# Altium PCB PCB1.PcbDoc
Units mil, origin at the board's own origin, x right, y up, seen from the top; angles counter-clockwise.
Board outline 6000 x 4000 mil, 2 copper layers (Top Layer, Bottom Layer); 56 components, 29 nets, 196 pads, 0 vias.
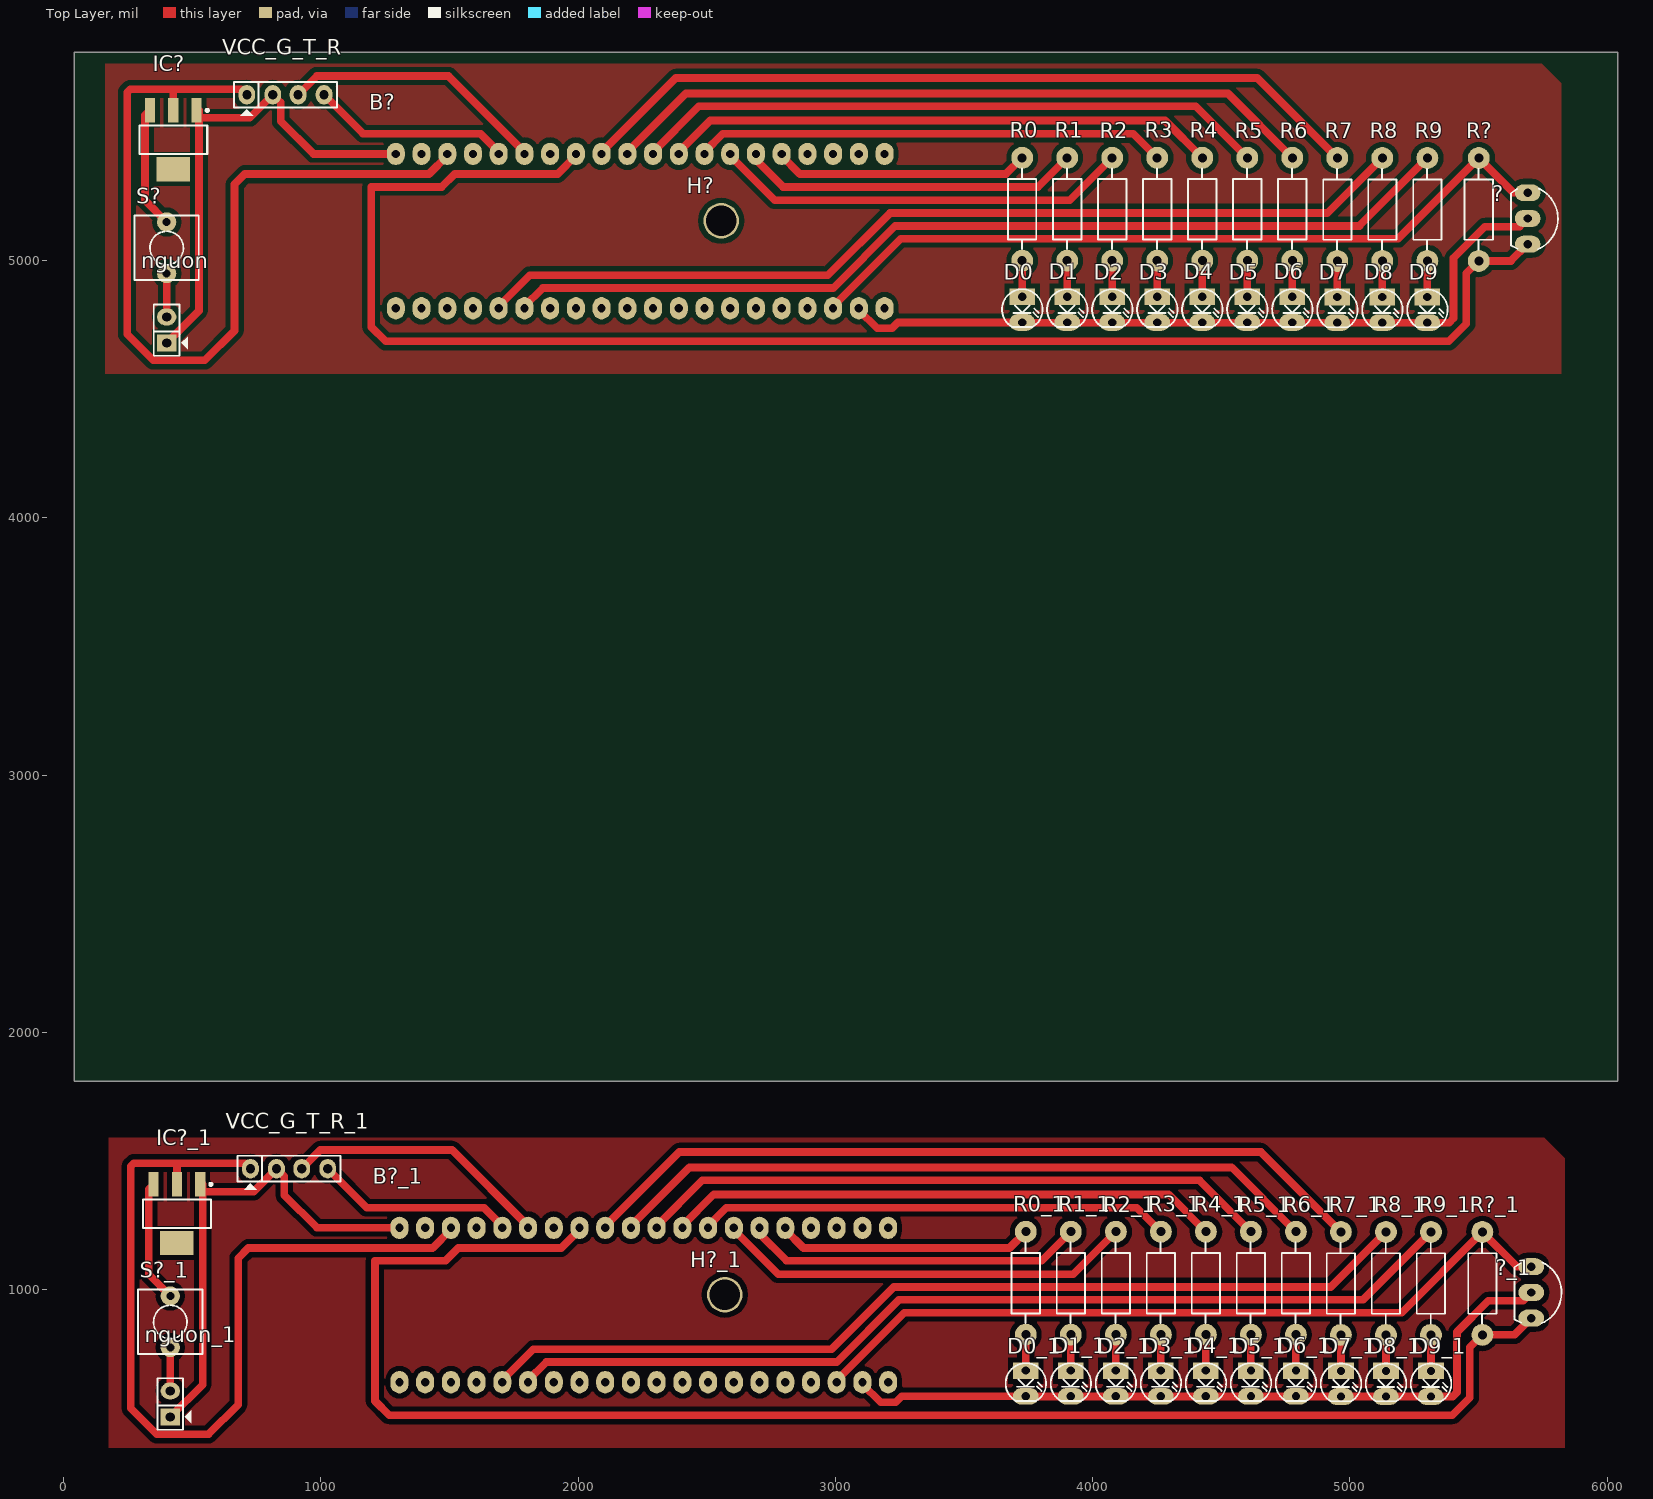
[diagram p0: Top Layer view]
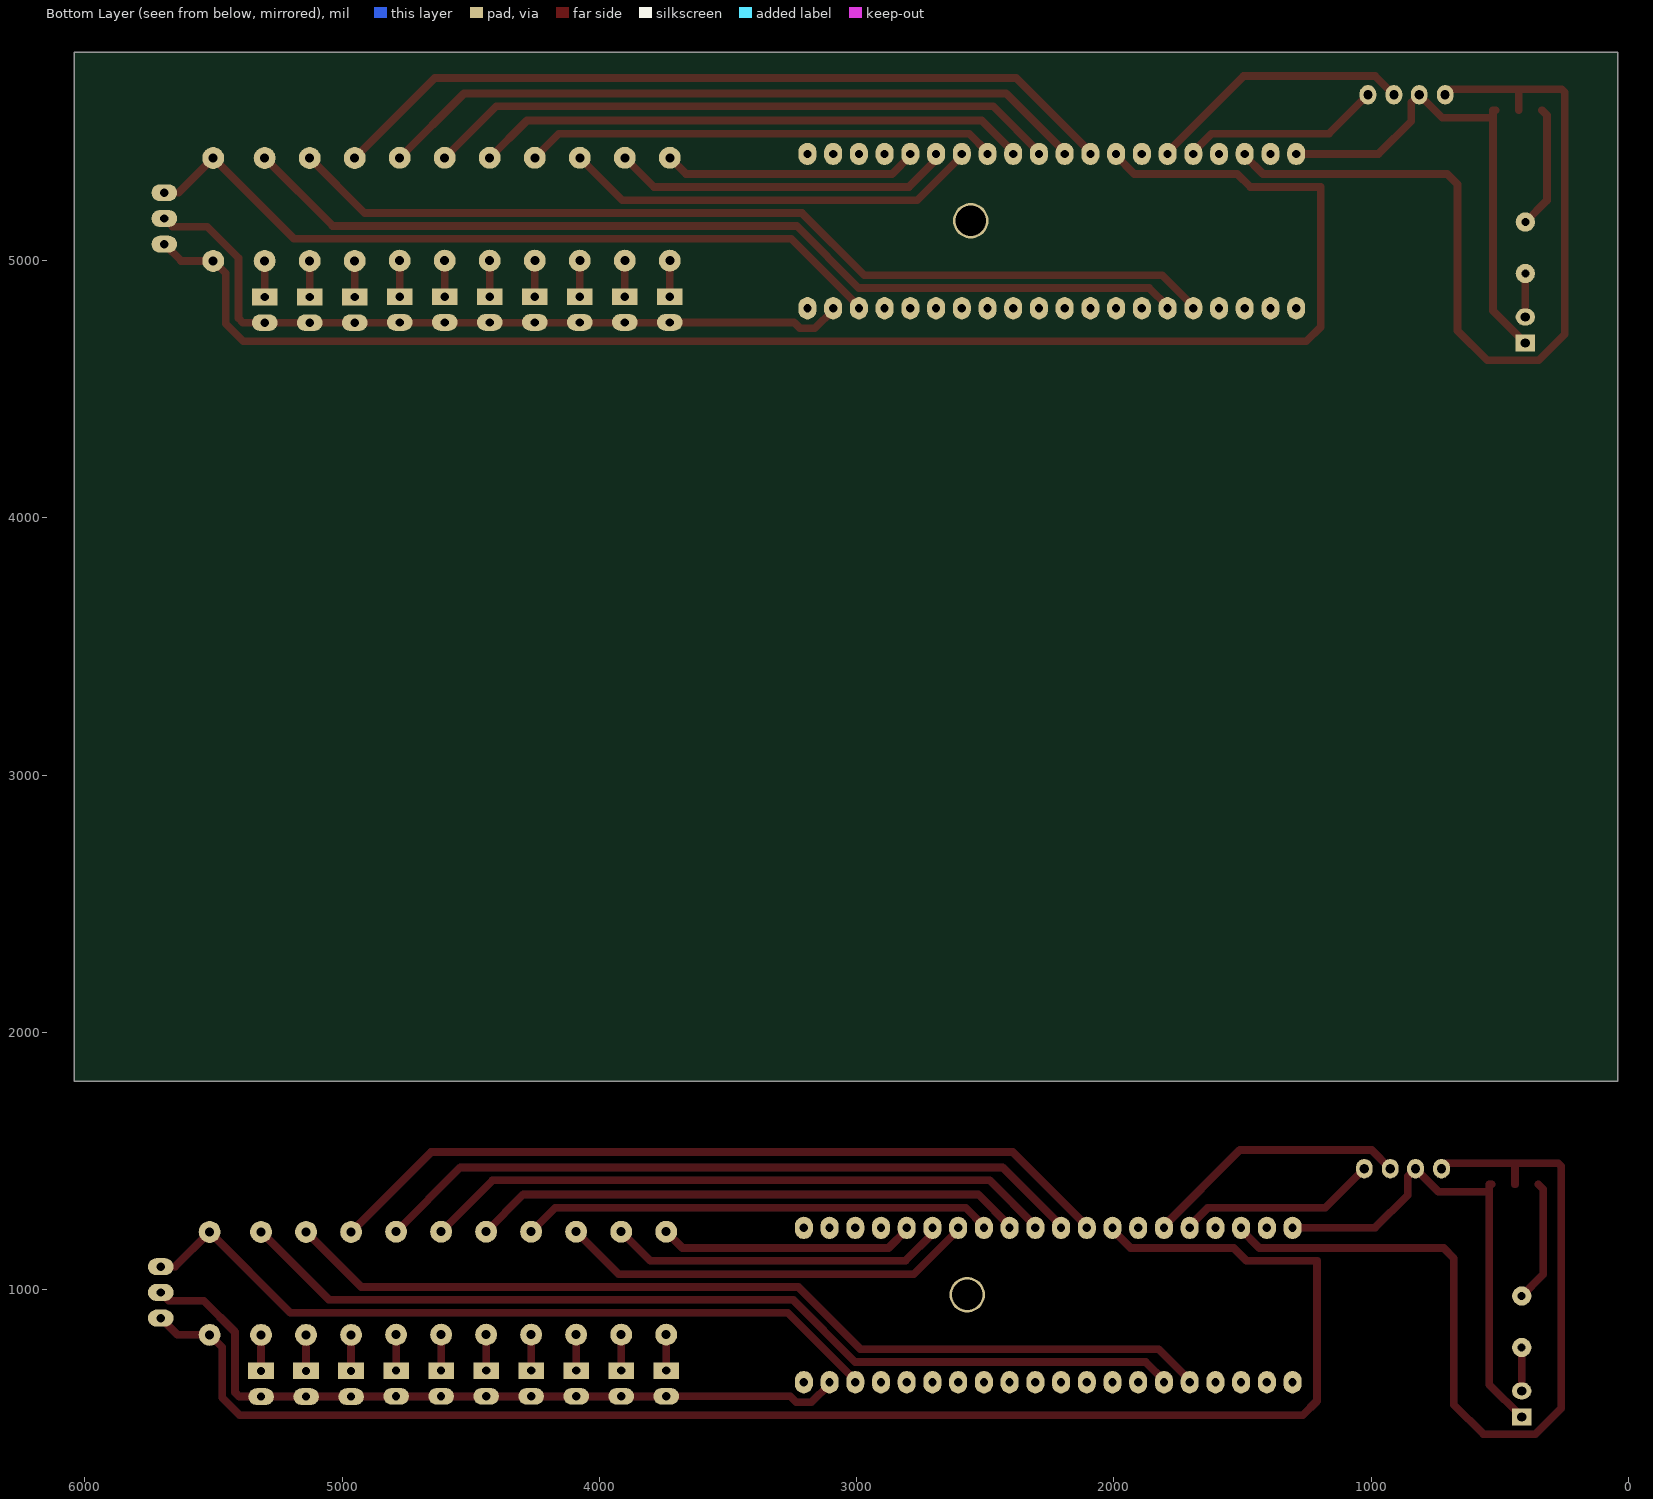
[diagram p1: Bottom Layer view, seen from below]

## Layer stack, top to bottom
Top Solder: solder mask 0.4, Solder Resist, Dk 3.5
Top Layer: signal copper 1.4
Dielectric 1: dielectric 12.6, FR-4, Dk 4.8
Bottom Layer: signal copper 1.4
Bottom Solder: solder mask 0.4, Solder Resist, Dk 3.5

## Board outline
41.07,1810 6041.07,1810 6041.07,5810 41.07,5810

## Design rules (kind name [scope] priority, off if disabled: settings)
Clearance Clearance_1 [All] p1: gap=20 ignorepadtopadclearanceinfootprint=FALSE
Clearance [All] p2: gap=20 ignorepadtopadclearanceinfootprint=FALSE
PolygonConnect [All] p1: connectstyle=Relief reliefconductorwidth=10 reliefentries=4 polygonreliefangle="90 Angle" airgapwidth=10
RoutingVias [All] p1: holewidth=28 width=50 viastyle="Through Hole" minholewidth=28 minwidth=50 maxholewidth=28 maxwidth=50
SolderMaskExpansion [All] p1: expansion=4
Width Width_1 [All] p1: maxlimit=40 minlimit=20 preferedwidth=30
Width [All] p2: maxlimit=40 minlimit=20 preferedwidth=30
30 further rules are at their usual default settings.

## Classes and differential pairs
component class Sheet1: ? D0 D1 D2 D3 D4 D5 D6 D7 D8 D9 H? IC? nguon P? R0 R1 R2 R3 R4 R5 R6 R7 R8 R9 R? S? VCC_G_T_R

## Components (designator, comment, footprint, x,y, rotation, side; value= is the part's Value field where it differs from the comment)
? "A1015" QTO-92 5691.01,5164 r270 top
?_1 "A1015" QTO-92 5705,989 r270 top (schematic designator ?)
B? "BluePill" BlUEPILL 1291.01,5415 r270 top
B?_1 "BluePill" BlUEPILL 1305,1240 r270 top (schematic designator B?)
D0 "LED" LED-3mm 3726.01,4860 r270 top
D0_1 "LED" LED-3mm 3740,685 r270 top (schematic designator D0)
D1 "LED" LED-3mm 3901.01,4860 r270 top
D1_1 "LED" LED-3mm 3915,685 r270 top (schematic designator D1)
D2 "LED" LED-3mm 4076.01,4860 r270 top
D2_1 "LED" LED-3mm 4090,685 r270 top (schematic designator D2)
D3 "LED" LED-3mm 4251.01,4860 r270 top
D3_1 "LED" LED-3mm 4265,685 r270 top (schematic designator D3)
D4 "LED" LED-3mm 4426.01,4860 r270 top
D4_1 "LED" LED-3mm 4440,685 r270 top (schematic designator D4)
D5 "LED" LED-3mm 4601.01,4860 r270 top
D5_1 "LED" LED-3mm 4615,685 r270 top (schematic designator D5)
D6 "LED" LED-3mm 4776.01,4860 r270 top
D6_1 "LED" LED-3mm 4790,685 r270 top (schematic designator D6)
D7 "LED" LED-3mm 4951.01,4859 r270 top
D7_1 "LED" LED-3mm 4965,684 r270 top (schematic designator D7)
D8 "LED" LED-3mm 5126.01,4859 r270 top
D8_1 "LED" LED-3mm 5140,684 r270 top (schematic designator D8)
D9 "LED" LED-3mm 5301.01,4859 r270 top
D9_1 "LED" LED-3mm 5315,684 r270 top (schematic designator D9)
H? "Hole" "LO KHOAN 3MM" 2486.01,5160 r0 top
H?_1 "Hole" "LO KHOAN 3MM" 2500,985 r0 top (schematic designator H?)
IC? "LM1117" SOT223-4N 426.01,5470 r270 top value=LM317
IC?_1 "LM1117" SOT223-4N 440,1295 r270 top value=LM317 (schematic designator IC?)
nguon "Header 2" JP2 400.22,4680 r90 top
nguon_1 "Header 2" JP2 414.21,505 r90 top (schematic designator nguon)
R0 "RESISTOR" "RES 1/2W" 3726,5400 r270 top value=330
R0_1 "RESISTOR" "RES 1/2W" 3739.99,1225 r270 top value=330 (schematic designator R0)
R1 "RESISTOR" "RES 1/2W" 3901.01,5400 r270 top value=330
R1_1 "RESISTOR" "RES 1/2W" 3915,1225 r270 top value=330 (schematic designator R1)
R2 "RESISTOR" "RES 1/2W" 4076.01,5400 r270 top value=330
R2_1 "RESISTOR" "RES 1/2W" 4090,1225 r270 top value=330 (schematic designator R2)
R3 "RESISTOR" "RES 1/2W" 4251.01,5400 r270 top value=330
R3_1 "RESISTOR" "RES 1/2W" 4265,1225 r270 top value=330 (schematic designator R3)
R4 "RESISTOR" "RES 1/2W" 4426.01,5400 r270 top value=330
R4_1 "RESISTOR" "RES 1/2W" 4440,1225 r270 top value=330 (schematic designator R4)
R5 "RESISTOR" "RES 1/2W" 4601.01,5400 r270 top value=330
R5_1 "RESISTOR" "RES 1/2W" 4615,1225 r270 top value=330 (schematic designator R5)
R6 "RESISTOR" "RES 1/2W" 4776.01,5400 r270 top value=330
R6_1 "RESISTOR" "RES 1/2W" 4790,1225 r270 top value=330 (schematic designator R6)
R7 "RESISTOR" "RES 1/2W" 4951.01,5399 r270 top value=330
R7_1 "RESISTOR" "RES 1/2W" 4965,1224 r270 top value=330 (schematic designator R7)
R8 "RESISTOR" "RES 1/2W" 5126.01,5399 r270 top value=330
R8_1 "RESISTOR" "RES 1/2W" 5140,1224 r270 top value=330 (schematic designator R8)
R9 "RESISTOR" "RES 1/2W" 5301.01,5399 r270 top value=330
R9_1 "RESISTOR" "RES 1/2W" 5315,1224 r270 top value=330 (schematic designator R9)
R? "RESISTOR" "RES 1/2W" 5501.01,5399 r270 top value=1K
R?_1 "RESISTOR" "RES 1/2W" 5515,1224 r270 top value=1K (schematic designator R?)
S? "Tact SW - 2Pin" SW2 400.22,4950 r90 top
S?_1 "Tact SW - 2Pin" SW2 414.21,775 r90 top (schematic designator S?)
VCC_G_T_R "Header 4" JP4 812.01,5645 r0 top
VCC_G_T_R_1 "Header 4" JP4 826,1470 r0 top (schematic designator VCC_G_T_R)

## Footprints (in the part's own frame and the unit in brackets; to place one, negate y for a bottom-side part, rotate by r counter-clockwise, add the part's x,y. Pads: shape width x height; smd on the part's side, far side on the other; paste and mask are expansions set on the pad)
BlUEPILL [mil]
  oval 86.61x70 hole 32: 1(0,1900) 2(0,1800) 3(0,1700) 4(0,1600) 5(0,1500) 6(0,1400) 7(0,1300) 8(0,1200) 9(0,1100) 10(0,1000) 11(0,900) 12(0,800) 13(0,700) 14(0,600) 15(0,500) 16(0,400) 17(0,300) 18(0,200) 19(0,100) 20(0,0) 21(600,0) 22(600,100) 23(600,200) 24(600,300) 25(600,400) 26(600,500) 27(600,600) 28(600,700) 29(600,800) 30(600,900) 31(600,1000) 32(600,1100) 33(600,1200) 34(600,1300) 35(600,1400) 36(600,1500) 37(600,1600) 38(600,1700) 39(600,1800) 40(600,1900)
  body extent -141,-113 745,2196, height 571
JP2 [mil]
  rect 65x75 hole 36: 1(0,0)
  oval 65x75 hole 36: 2(101,0)
  silkscreen extent -50,-81 150,50, body extent -48,-50 148,48, height 323
JP4 [mil] "Jumper 4"
  oval 65x75 hole 36: 1(-100,0) 2(1,0) 3(99,0) 4(200,0)
  silkscreen extent -150,-81 250,50, body extent -148,-48 248,50, height 323
LED-3mm [mil] "LED 2 PIN, 3ly Only colour"
  rect 65x100 hole 32: 1(0,0)
  oval 65x100 hole 32: 2(100,0)
  silkscreen extent -29,-78 118,79, body extent -25,-75 113,75, height 217
"LO KHOAN 3MM" [mil]
  round 138 hole 118.1: 1(70,-5)
QTO-92 [mil] "TO-92"
  oval 66x100 hole 32: 1(-100,0) 2(0,0) 3(100,0)
  silkscreen extent -117,-65 120,118, body extent -109,-66 109,95, height 245
"RES 1/2W" [mil] "R 1/2W, 2 pin, 300mil"
  round 85 hole 35: 1(0,0) 2(400,0)
  silkscreen extent 42,-55 356,55, body extent -12,-45 414,49, height 91
SOT223-4N [mm] "SOT223, 4-Leads, Body 6.5x3.5mm, Pitch 2.3mm, Lead Span 7mm, IPC Medium Density"
  rect 2.4x1 smd: 1(-2.9,2.3) 2(-2.9,0) 3(-2.9,-2.3)
  rect 2.4x3.3 smd: 4(2.9,0)
  silkscreen extent -3.02,-3.35 1.4,3.48, body extent -3.39,-3.27 3.5,3.23, height 1.72
SW2 [mil] "SW button 2pin, 250x 250 mil"
  round 75 hole 31: 1(0,0) 2(200,0)
  silkscreen extent -25,-125 225,125

## Part data
? ?_1: "PNP Bipolar Transistor"
H? H?_1: "Hole 3mm"
IC? IC?_1: "Available in 1.8V, 2.5V, 2.85V, 3.3V, 5V, and  Adjustable Versions"
nguon nguon_1: "Header, 2-Pin", LatestRevisionDate=17-Jul-2002, LatestRevisionNote="Re-released for DXP Platform.", Publisher="Altium Limited"
R0 R0_1 R1 R1_1 R2 R2_1 R3 R3_1 R4 R4_1 R5 R5_1 R6 R6_1 R7 R7_1 R8 R8_1 R9 R9_1 R? R?_1: "Resistor"
S? S?_1: "Switch button 2 pin"
VCC_G_T_R VCC_G_T_R_1: "Header, 4-Pin", LatestRevisionDate=17-Jul-2002, LatestRevisionNote="Re-released for DXP Platform.", Publisher="Altium Limited"

## Nets (pads, with @x,y where several pads share a name; then routed paths per layer and width w, separated by ;. In a path a pad name is that pad's centre, name@x,y a point inside that pad or via, vN(x,y) a via of type N, cw(c..) or ccw(c..) an arc to the next point about the centre after c; other vN are vias at no path point)
Net?_1: ?.1 B?.38 R?.1 | length 3002.1
  Top Layer w30: B?.38 2991.01,4822.3 3253.7,5085 5187.01,5085 R?.1 5636.01,5264 ?.1
Net?_2: ?.2 B?.39 D0.2 D1.2 D2.2 D3.2 D4.2 D5.2 D6.2 D7.2 D8.2 D9.2 | length 2959.1
  Top Layer w30: B?.39@3091.01,4822.3 B?.39 3091.01,4807.7 3162.01,4736.69 3220,4736.69 3243.31,4760 D0.2 3727.01,4759 D7.2 D8.2 D9.2 5385.68,4759 5402.4,4775.72 5402.4,5010 5524.4,5132 5659.01,5132 ?.2
Net?_3: ?.3 B?.13 R?.2 | length 6185.8
  Top Layer w30: B?.13 1991.01,5407.7 1920,5336.69 1520,5336.69 1470,5286.69 1196.01,5286.69 1196.01,4742 1251.31,4686.69 5384.08,4686.69 5452.4,4755.01 5452.4,4950.4 R?.2 5626.01,4999 ?.3
NetB?_5: B?.5 R0.1 | length 1019.4
  Top Layer w30: B?.5@2791.01,5436.44 B?.5 2791.01,5407.7 2862.01,5336.69 3662.69,5336.69 R0.1
NetB?_6: B?.6 R1.1 | length 1331
  Top Layer w30: B?.6@2691.01,5422.3 B?.6 2691.01,5391.69 2796.01,5286.69 3787.7,5286.69 R1.1
NetB?_7: B?.7 R2.1 | length 1639.5
  Top Layer w30: B?.7@2591.01,5422.3 B?.7 2591.01,5407.7 2763.7,5235 3911.01,5235 R2.1
NetB?_8: B?.8 R3.1 | length 1842.7
  Top Layer w30: B?.8@2491.01,5407.7 B?.8 2491.01,5422.3 2562.01,5493.31 4157.7,5493.31 R3.1
NetB?_9: B?.9 R4.1 | length 2160.5
  Top Layer w30: B?.9@2391.01,5407.7 B?.9 2391.01,5422.3 2513.7,5545 4281.01,5545 R4.1
NetB?_10: B?.10 R5.1 | length 2473.7
  Top Layer w30: B?.10 2291.01,5422.3 2468.7,5600 4401.01,5600 R5.1
NetB?_11: B?.11 R6.1 | length 2797.5
  Top Layer w30: B?.11@2191.01,5407.7 B?.11 2191.01,5422.3 2418.7,5650 4526.01,5650 R6.1
NetB?_12: B?.12 R7.1 | length 3115.3
  Top Layer w30: B?.12 2091.01,5422.3 2378.7,5710 4640.01,5710 R7.1
NetB?_15: B?.15 VCC_G_T_R.3 | length 1039.6
  Top Layer w30: VCC_G_T_R.3 983.51,5717.5 1495.81,5717.5 1791.01,5422.3 B?.15
NetB?_16: B?.16 VCC_G_T_R.4 | length 778.5
  Top Layer w30: VCC_G_T_R.4 1163.7,5493.31 1620,5493.31 1691.01,5422.3 B?.16
NetB?_18: B?.18 IC?.2 VCC_G_T_R.1 | length 3457.9
  Top Layer w30: IC?.2 426.01,5666.42 ; VCC_G_T_R.1 690.59,5666.42 426.01,5666.42 ; B?.18 1491.01,5407.7 1420,5336.69 703.63,5336.69 663.97,5297.03 663.97,4727.97 548.51,4612.5 348.22,4612.5 246.79,4713.93 246.79,5654.21 259,5666.42 426.01,5666.42
NetB?_20: B?.20 IC?.1 nguon.1 VCC_G_T_R.2 | length 1905.3
  Top Layer w30: nguon.1 525.97,4805.75 IC?.1@525.97,5555.55 ; IC?.1 525.97,5584.17 IC?.1@525.97,5555.55 ; B?.20 970.83,5415 843.51,5542.32 843.51,5614.5 VCC_G_T_R.2 723.56,5555.55 IC?.1@525.97,5555.55
NetB?_25: B?.25 R8.1 | length 3688.5
  Top Layer w30: B?.25@1691.01,4807.7 B?.25 1691.01,4822.3 1812.01,4943.31 2970.59,4943.31 3212.28,5185 4912.01,5185 R8.1
NetB?_26: B?.26 R9.1 | length 3763.5
  Top Layer w30: B?.26@1791.01,4807.7 B?.26 1791.01,4822.3 1862.01,4893.31 2991.3,4893.31 3232.99,5135 5037.01,5135 R9.1
NetD0_1: D0.1 R0.2 | length 140
  Top Layer w30: D0.1 R0.2
NetD1_1: D1.1 R1.2 | length 140
  Top Layer w30: D1.1 R1.2
NetD2_1: D2.1 R2.2 | length 140
  Top Layer w30: D2.1 R2.2
NetD3_1: D3.1 R3.2 | length 140
  Top Layer w30: D3.1 R3.2
NetD4_1: D4.1 R4.2 | length 140
  Top Layer w30: D4.1 R4.2
NetD5_1: D5.1 R5.2 | length 140
  Top Layer w30: D5.1 R5.2
NetD6_1: D6.1 R6.2 | length 140
  Top Layer w30: D6.1 R6.2
NetD7_1: D7.1 R7.2 | length 140
  Top Layer w30: D7.1 R7.2
NetD8_1: D8.1 R8.2 | length 140
  Top Layer w30: D8.1 R8.2
NetD9_1: D9.1 R9.2 | length 140
  Top Layer w30: D9.1 R9.2
NetIC?_3: IC?.3 S?.2 | length 477.1
  Top Layer w30: IC?.3 316.01,5564.72 316.01,5234.21 S?.2
Netnguon_2: nguon.2 S?.1 | length 170.1
  Top Layer w30: S?.1 nguon.2 nguon.2@401.01,4781.79
pads on no net: ?_1.1 ?_1.2 ?_1.3 B?.1 B?.2 B?.3 B?.4 B?.14 B?.17 B?.19 B?.21 B?.22 B?.23 B?.24 B?.27 B?.28 B?.29 B?.30 B?.31 B?.32 B?.33 B?.34 B?.35 B?.36 B?.37 B?.40 B?_1.1 B?_1.2 B?_1.3 B?_1.4 B?_1.5 B?_1.6 B?_1.7 B?_1.8 B?_1.9 B?_1.10 B?_1.11 B?_1.12 B?_1.13 B?_1.14 B?_1.15 B?_1.16 B?_1.17 B?_1.18 B?_1.19 B?_1.20 B?_1.21 B?_1.22 B?_1.23 B?_1.24 B?_1.25 B?_1.26 B?_1.27 B?_1.28 B?_1.29 B?_1.30 B?_1.31 B?_1.32 B?_1.33 B?_1.34 B?_1.35 B?_1.36 B?_1.37 B?_1.38 B?_1.39 B?_1.40 D0_1.1 D0_1.2 D1_1.1 D1_1.2 D2_1.1 D2_1.2 D3_1.1 D3_1.2 D4_1.1 D4_1.2 D5_1.1 D5_1.2 D6_1.1 D6_1.2 D7_1.1 D7_1.2 D8_1.1 D8_1.2 D9_1.1 D9_1.2 H?.1 H?_1.1 IC?.4 IC?_1.1 IC?_1.2 IC?_1.3 IC?_1.4 nguon_1.1 nguon_1.2 R0_1.1 R0_1.2 R1_1.1 R1_1.2 R2_1.1 R2_1.2 R3_1.1 R3_1.2 R4_1.1 R4_1.2 R5_1.1 R5_1.2 R6_1.1 R6_1.2 R7_1.1 R7_1.2 R8_1.1 R8_1.2 R9_1.1 R9_1.2 R?_1.1 R?_1.2 S?_1.1 S?_1.2 VCC_G_T_R_1.1 VCC_G_T_R_1.2 VCC_G_T_R_1.3 VCC_G_T_R_1.4
copper on no net: | length 45207.1
  Top Layer w30: 349.45,1409.17 330,1389.72 330,1059.21 414.21,975 ; 414.21,505 539.96,630.75 539.96,1380.55 ; 414.21,775 414.21,606 415,606.79 ; 440,1409.17 440,1491.42 ; 530.55,1409.17 539.96,1409.17 539.96,1380.55 ; 726,1470 704.58,1491.42 440,1491.42 ; 925,1470 997.5,1542.5 1509.8,1542.5 1805,1247.3 1805,1240 ; 1026,1470 1177.69,1318.31 1633.99,1318.31 1705,1247.3 1705,1240 ; 1305,1240 984.83,1240 857.5,1367.33 857.5,1439.5 827,1470 737.55,1380.55 539.96,1380.55 ; 1505,1240 1505,1232.7 1433.99,1161.69 717.63,1161.69 677.97,1122.03 677.97,552.97 562.5,437.5 362.22,437.5 260.79,538.93 260.79,1479.21 272.99,1491.42 440,1491.42 ; 1705,632.7 1705,640 1705,647.3 1826.01,768.31 2984.58,768.31 3226.28,1010 4926,1010 5140,1224 ; 1805,632.7 1805,640 1805,647.3 1876.01,718.31 3005.29,718.31 3246.99,960 5051,960 5315,1224 ; 2005,1240 2005,1232.7 1933.99,1161.69 1533.99,1161.69 1483.99,1111.69 1210,1111.69 1210,567 1265.31,511.69 5398.08,511.69 5466.4,580.01 5466.4,775.4 5515,824 5640,824 5705,889 ; 2105,1240 2105,1247.3 2392.7,1535 4654,1535 4965,1224 ; 2205,1232.7 2205,1240 2205,1247.3 2432.7,1475 4540,1475 4790,1225 ; 2305,1240 2305,1247.3 2482.7,1425 4415,1425 4615,1225 ; 2405,1232.7 2405,1240 2405,1247.3 2527.7,1370 4295,1370 4440,1225 ; 2505,1232.7 2505,1240 2505,1247.3 2576.01,1318.31 4171.69,1318.31 4265,1225 ; 2605,1247.3 2605,1240 2605,1232.7 2777.7,1060 3925,1060 4090,1225 ; 2705,1247.3 2705,1240 2705,1216.69 2810,1111.69 3801.69,1111.69 3915,1225 ; 2805,1261.44 2805,1240 2805,1232.7 2876.01,1161.69 3676.69,1161.69 3739.99,1225 ; 3005,640 3005,647.3 3267.7,910 5201,910 5515,1224 5650,1089 5705,1089 ; 3105,647.3 3105,640 3105,632.7 3176.01,561.69 3233.99,561.69 3257.3,585 3740,585 3741,584 4965,584 5140,584 5315,584 5399.68,584 5416.4,600.72 5416.4,835 5538.4,957 5673,957 5705,989 ; 3739.99,685.01 3739.99,825 ; 3915,685 3915,825 ; 4090,685 4090,825 ; 4265,685 4265,825 ; 4440,685 4440,825 ; 4615,685 4615,825 ; 4790,685 4790,825 ; 4965,684 4965,824 ; 5140,684 5140,824 ; 5315,684 5315,824

## Polygon pours and split planes (outlines as drawn)
no net on Top Layer "Top Layer-No Net 1" (solid, pour order 94): 175,1590 175,385 5835,385 5835,1510 5755,1590
no net on Top Layer "Top Layer-No Net 6" (solid, pour order 92): 161.01,5765 161.01,4560 5821.01,4560 5821.01,5688.99 5745,5765
no net on Top Layer "Top Layer-No Net 7" (solid, pour order 88): 235,5735
no net on Top Layer "Top Layer-No Net 8" (solid, pour order 86): 235,5735
no net on Top Layer "Top Layer-No Net" (solid, pour order 82): 4024.94,866
no net on Top Layer "Top Layer-No Net 2" (solid, pour order 80): 450,1181
no net on Top Layer "Top Layer-No Net 4" (solid, pour order 78): 560,1105.33
no net on Top Layer "Top Layer-No Net 3" (solid, pour order 76): 450,1181
no net on Top Layer "Top Layer-No Net 5" (solid, pour order 74): 175,1495
no net on Top Layer "Top Layer-No Net 5" (solid, pour order 30): 161.01,5670
no net on Top Layer "Top Layer-No Net 3" (solid, pour order 28): 436.01,5356
no net on Top Layer "Top Layer-No Net 4" (solid, pour order 26): 546.01,5280.33
no net on Top Layer "Top Layer-No Net 2" (solid, pour order 18): 436.01,5356
no net on Top Layer "Top Layer-No Net" (solid, pour order 16): 4010.95,5041